# Altium PCB nucleo_breakout.PcbDoc
Units mil, origin at the board's own origin, x right, y up, seen from the top; angles counter-clockwise.
Board outline 5250 x 4000 mil, 2 copper layers (Top Layer, Bottom Layer); 8 components, 17 nets, 132 pads, 5 vias.
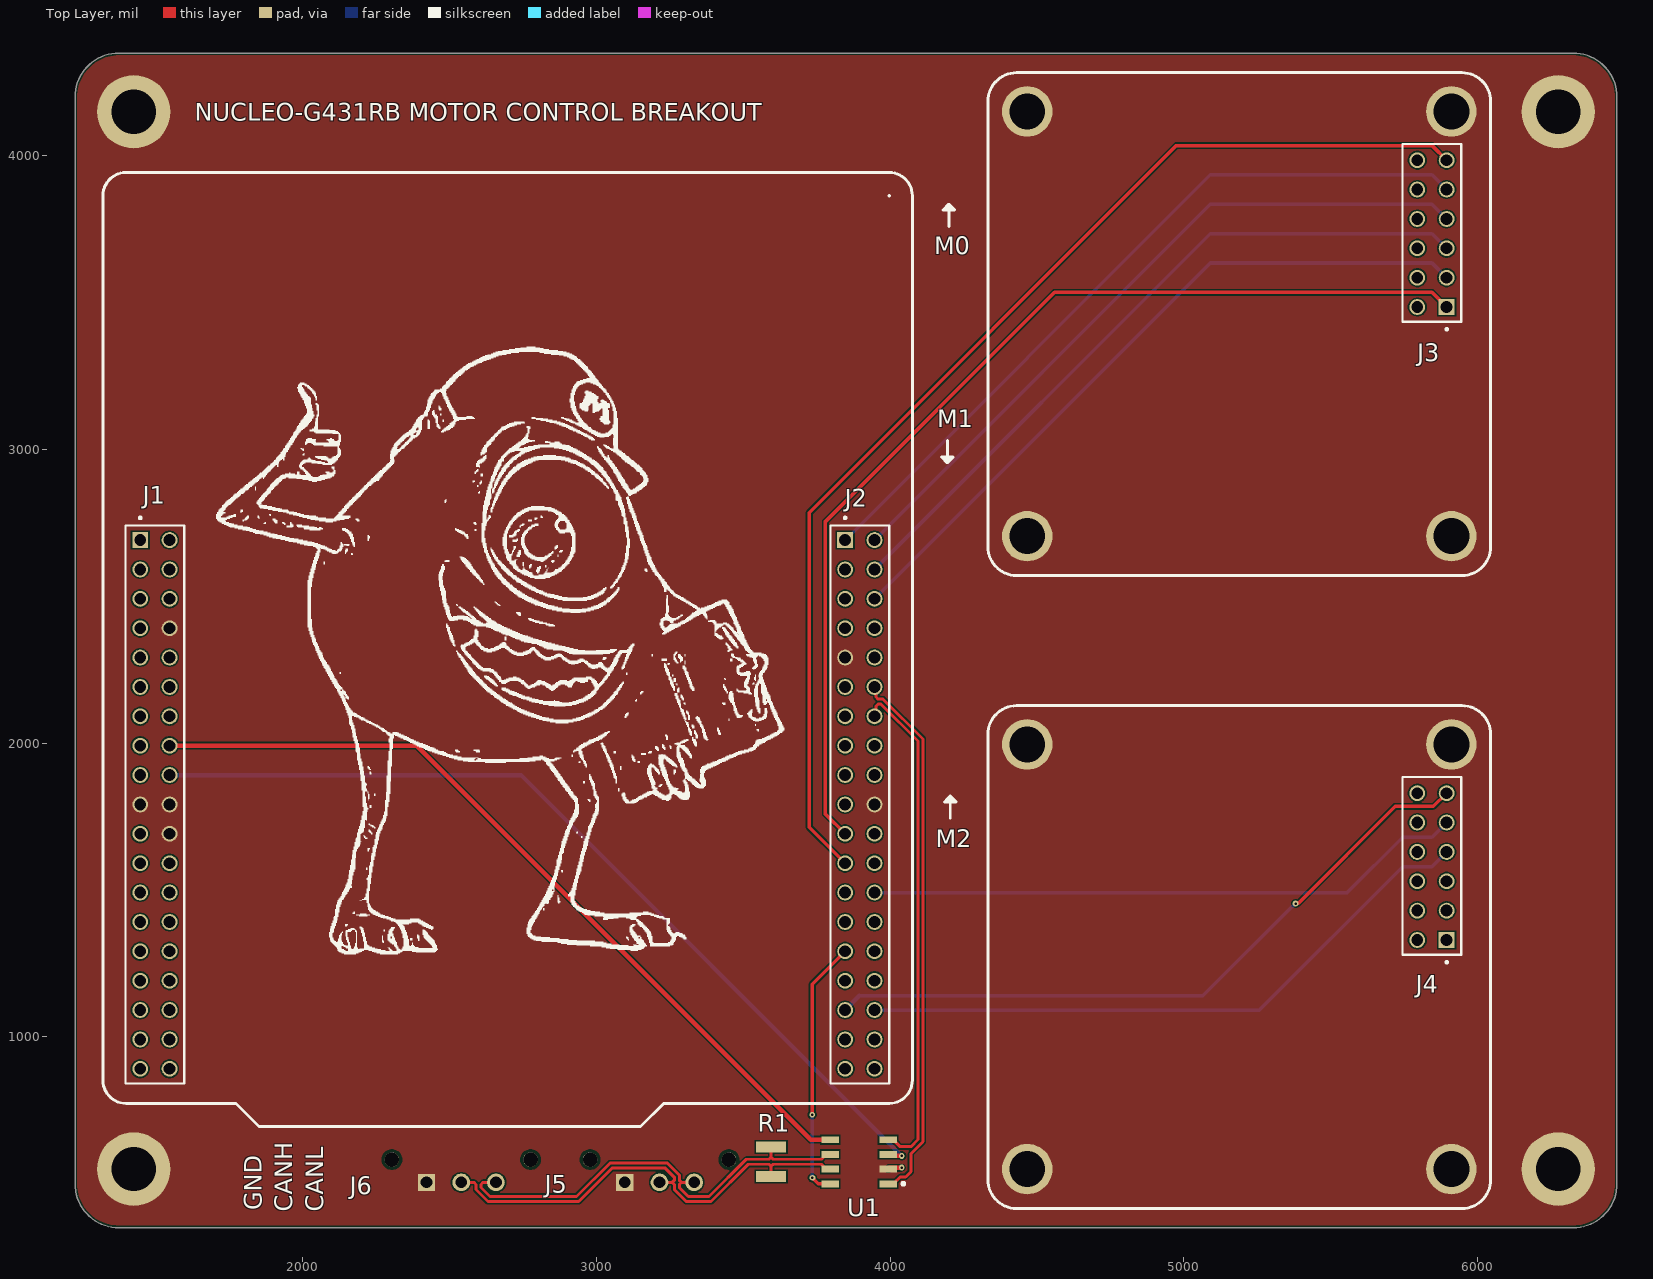
[diagram p0: Top Layer view]
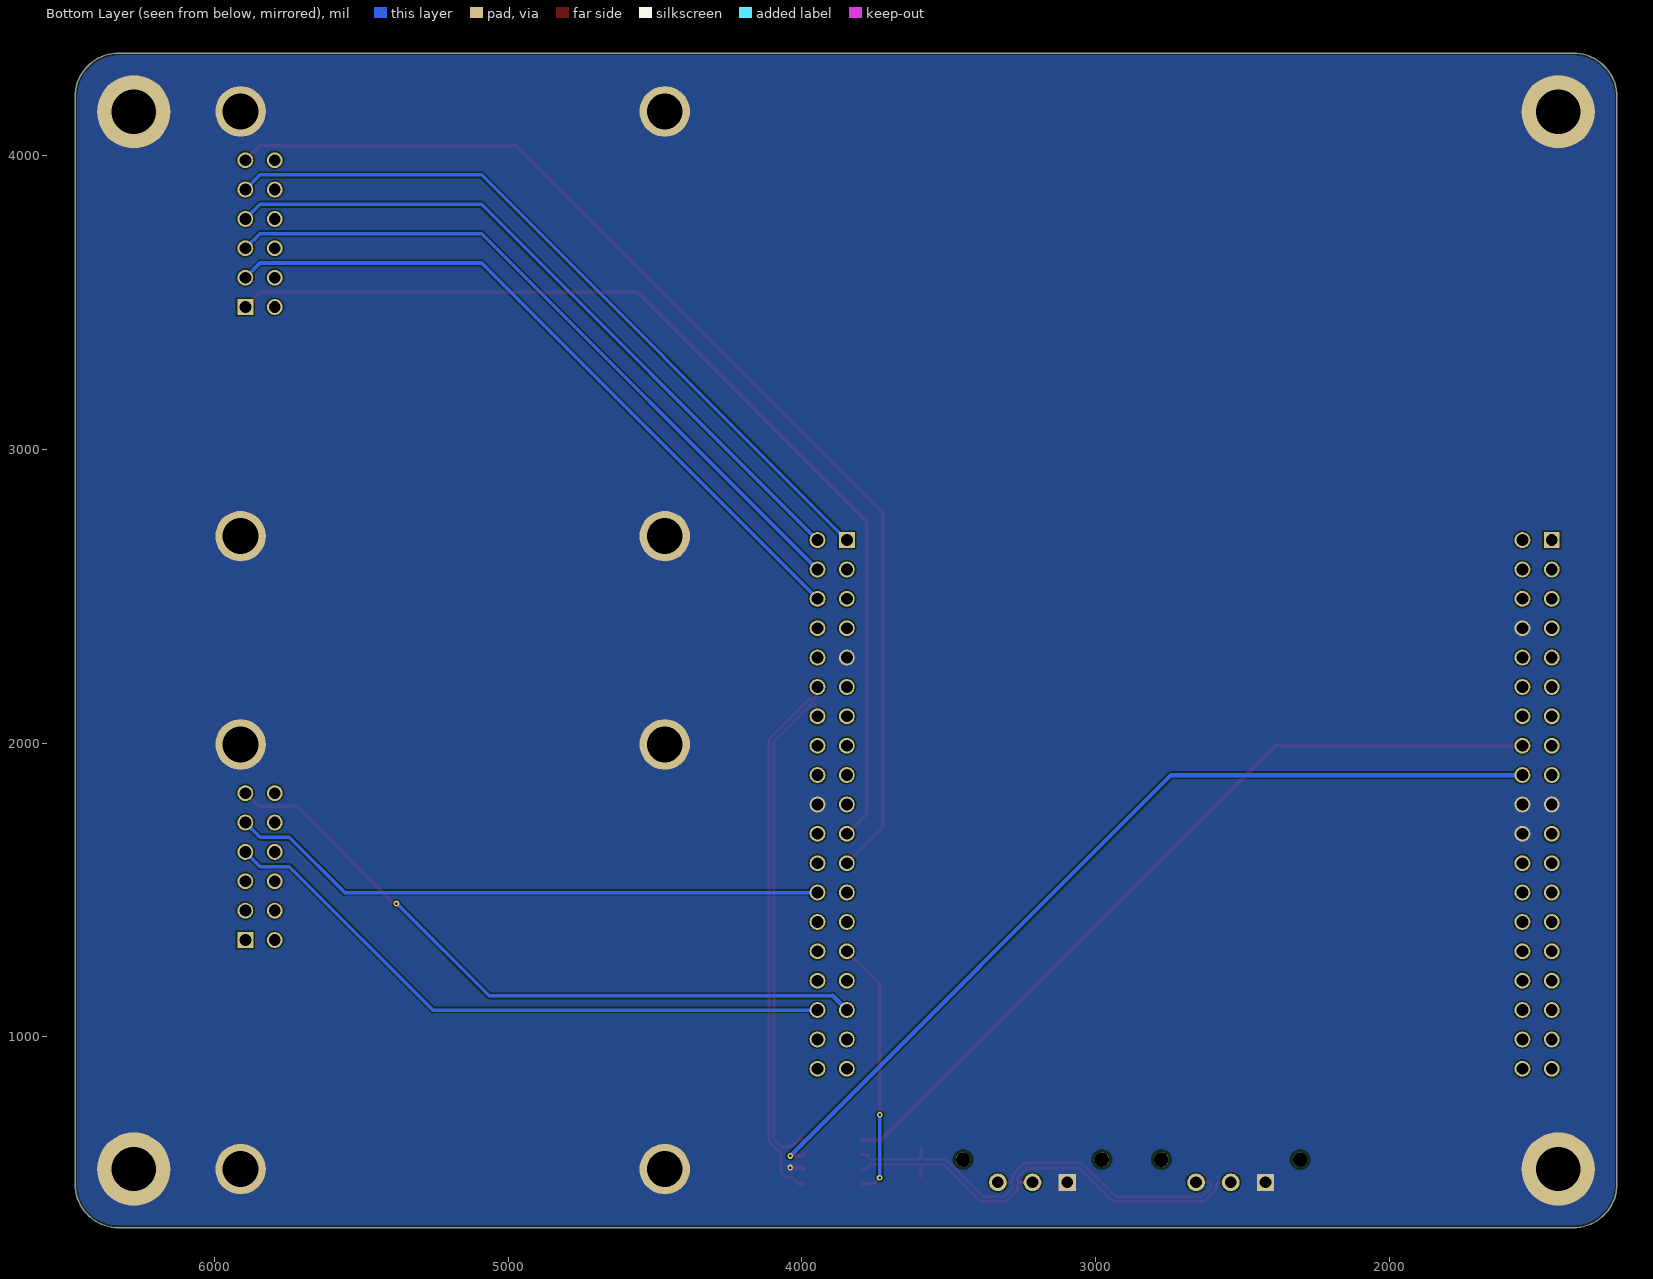
[diagram p1: Bottom Layer view, seen from below]
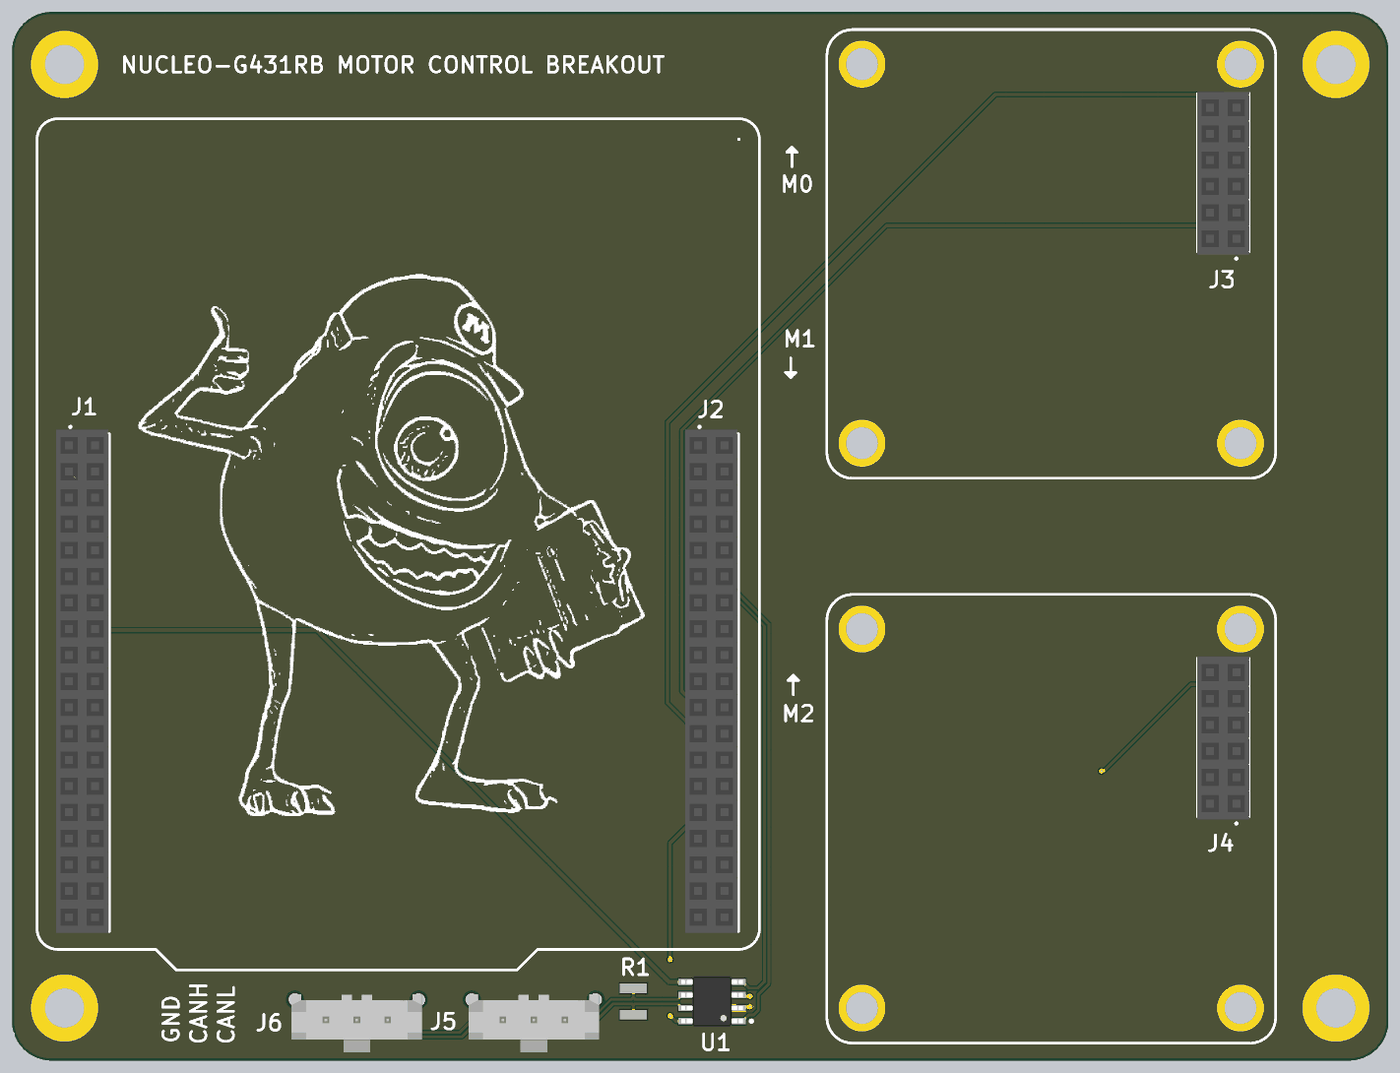
[diagram p2: 3D render of the assembled board from above, using the file's embedded part models]

## Layer stack, top to bottom
Top Solder: solder mask 0.4, Solder Resist, Dk 3.5
Top Layer: signal copper 1.4
Dielectric 1: dielectric 12.6, FR-4, Dk 4.8
Bottom Layer: signal copper 1.4
Bottom Solder: solder mask 0.4, Solder Resist, Dk 3.5

## Board outline
1225,500 ccw(c1375,500) 1375,350 6325,350 ccw(c6325,500) 6475,500 6475,4200 ccw(c6325,4200) 6325,4350 1375,4350 ccw(c1375,4200) 1225,4200

## Design rules (kind name [scope] priority, off if disabled: settings)
BoardOutlineClearance [All] p1: gap=7.87 ignorepadtopadclearanceinfootprint=FALSE
Clearance [All] p1: gap=5 ignorepadtopadclearanceinfootprint=FALSE except(9.84: Arc-Hole Track-Hole SMDPad-Hole THPad-Hole Via-Hole Fill-Hole Poly-Hole Region-Hole Text-Hole)
ComponentClearance [All] p1: gap=5 collisioncheckmode=3 verticalgap=5 showdistances=TRUE
DiffPairsRouting [All] p1: maxlimit=10 minlimit=5 mostfreqgap=5 toplayer_minwidth=5 toplayer_maxwidth=1000 toplayer_prefwidth=5 bottomlayer_minwidth=5 bottomlayer_maxwidth=1000 bottomlayer_prefwidth=5 maxuncoupledlength=500
Height [All] p1: minheight=0 maxheight=71497.94 prefheight=500
HoleSize [All] p1: absolutevalues=TRUE maxlimit=248.03 minlimit=11.81 maxpercent=80.000 minpercent=20.000
HoleToHoleClearance [All] p1: gap=9.84 allowstackedmicrovias=FALSE
MinimumAnnularRing [All] p1: minimumring=3
MinimumSolderMaskSliver [All] p1: minsoldermaskwidth=0
PlaneClearance [All] p1: clearance=5
PlaneConnect PlaneConnectPowerPads [InPadClass('PowerPads')] p1: planeconnectstyle=Direct reliefexpansion=20 reliefentries=4 reliefconductorwidth=10 reliefairgap=10
PlaneConnect [All] p2: pad.planeconnectstyle=Relief pad.reliefexpansion=11.81 pad.reliefentries=4 pad.reliefconductorwidth=5 pad.reliefairgap=5 via.planeconnectstyle=Direct via.reliefexpansion=11.81 via.reliefentries=4 via.reliefconductorwidth=5 via.reliefairgap=5
PolygonConnect PolygonConnectPowerPads [All vs (InPadClass('PowerPads'))] p1: connectstyle=Direct reliefconductorwidth=10 reliefentries=4 polygonreliefangle="90 Angle" airgapwidth=10
PolygonConnect [All] p2: connectstyle=Direct reliefconductorwidth=5 reliefentries=4 polygonreliefangle="90 Angle" airgapwidth=5
RoutingVias [All] p1: holewidth=11.81 width=23.62 viastyle="Through Hole" minholewidth=11.81 minwidth=23.62 maxholewidth=23.62 maxwidth=259.84
SilkToSilkClearance [All] p1: silktosilkclearance=0
SilkToSolderMaskClearance [IsPad] p1: minsilkscreentomaskgap=5 clearancetoexposedcopper=TRUE
SolderMaskExpansion [All] p1: expansion=2.95 istentingtop=FALSE
Width [All] p1: maxlimit=1000 minlimit=5 preferedwidth=5 minimp=50.000000 maximp=50.000000 favimp=50.000000
20 further rules are at their usual default settings.

## Components (designator, comment, footprint, x,y, rotation, side; value= is the part's Value field where it differs from the comment)
J1 "PPPC192LFBN-RC" CONN-38POS_01 1447.05,2691.57 r270 top
J2 "PPPC192LFBN-RC" CONN-38POS_01 3847.05,2691.57 r270 top
J3 "PPTC062LFBN-RC" CONN-6POS_01 5895,3485 r90 top
J4 "PPTC062LFBN-RC" CONN-6POS_01 5895,1330 r90 top
J5 "Molex 43650-0315" 43650-0315 3215,505 r180 top
J6 "Molex 43650-0315" 43650-0315 2540,505 r180 top
R1 "RC1210FR-07120RL" RES-1210 3595,575 r90 top
U1 "TCAN1044VDRQ1" IC-8SOIC 3895,575 r90 top

## Footprints (in the part's own frame and the unit in brackets; to place one, negate y for a bottom-side part, rotate by r counter-clockwise, add the part's x,y. Pads: shape width x height; smd on the part's side, far side on the other; paste and mask are expansions set on the pad)
43650-0315 [mm]
  round 1.27 hole 1.27 unplated: 1(-6,-1.96) 1(6,-1.96)
  rect 1.482x1.482 / inner rect 1.524x1.524 / far side rect 1.482x1.482 hole 1.02: P$1(3,0)
  round 1.53 / inner round 1.524 / far side round 1.53 hole 1.02: P$2(0,0) P$3(-3,0)
  body extent -6.32,-2.47 6.33,3.14, height 10.03
CONN-6POS_01 [mm]
  rect 1.37x1.37 hole 1.02: 1(0,0)
  round 1.37 hole 1.02: 2(0,2.54) 3(2.54,0) 4(2.54,2.54) 5(5.08,0) 6(5.08,2.54) 7(7.62,0) 8(7.62,2.54) 9(10.16,0) 10(10.16,2.54) 11(12.7,0) 12(12.7,2.54)
  silkscreen extent -2.02,-1.27 14.1,3.81, body extent -1.52,-1.27 14.22,3.81, height 8.51
CONN-38POS_01 [mm]
  rect 1.37x1.37 hole 1.02: 1(0,0)
  round 1.37 hole 1.02: 2(0,2.54) 3(2.54,0) 4(2.54,2.54) 5(5.08,0) 6(5.08,2.54) 7(7.62,0) 8(7.62,2.54) 9(10.16,0) 10(10.16,2.54) 11(12.7,0) 12(12.7,2.54) 13(15.24,0) 14(15.24,2.54) 15(17.78,0) 16(17.78,2.54) 17(20.32,0) 18(20.32,2.54) 19(22.86,0) 20(22.86,2.54) 21(25.4,0) 22(25.4,2.54) 23(27.94,0) 24(27.94,2.54) 25(30.48,0) 26(30.48,2.54) 27(33.02,0) 28(33.02,2.54) 29(35.56,0) 30(35.56,2.54) 31(38.1,0) 32(38.1,2.54) 33(40.64,0) 34(40.64,2.54) 35(43.18,0) 36(43.18,2.54) 37(45.72,0) 38(45.72,2.54)
  silkscreen extent -2.02,-1.27 46.99,3.81, body extent -1.65,-1.4 47.12,3.68, height 8.51
IC-8SOIC [mm]
  rect 0.6x1.5 smd: 1(-1.905,-2.5) 2(-0.635,-2.5) 3(0.635,-2.5) 4(1.905,-2.5) 5(1.905,2.5) 6(0.635,2.5) 7(-0.635,2.5) 8(-1.905,2.5)
  silkscreen extent -2.03,-3.94 -1.78,-3.69, body extent -2.45,-3 2.45,3, height 1.75
RES-1210 [mm] "Chip Resistor, 2-Leads, Body 3.10x2.60mm, IPC High Density"
  rect 0.95x2.6 smd: 1(-1.275,0) 2(1.275,0)
  body extent -1.6,-1.35 1.6,1.35, height 0.6

## Part data
J1 J2: library part CONN-38POS-01
J3 J4: library part CONN-12POS-01, "12 Position Header Connector 0.100\" (2.54mm) Through Hole Tin"
J5 J6: library part "Micro-Fit Molex 3 Pin Vertical", Package=43650-0315, DeviceName=43650-0315, DeviceSetName=HEADER_POS3_?, GateName_1=G$1, LibraryName=con-molex-micro-fit-3_0_2, SymbolName_1=HEADER_POS3
R1: library part RES-120-0001, "RES 120 OHM 1% 1/2W 1210", Power=1/2W, Resistance=120R, Tolerance=1%, ComponentLink1Description=Datasheet, ComponentLink1URL=https://www.yageo.com/upload/media/product/products/datasheet/rchip/PYu-RC_Group_51_RoHS_L_12.pdf, Size=1210
U1: library part IC-CAN-0001, "IC TRANSCEIVER 1/1 8SOIC", ComponentLink1Description=Datasheet, ComponentLink1URL=https://www.ti.com/lit/ds/symlink/tcan1044-q1.pdf?HQS=dis-dk-null-digikeymode-dsf-pf-null-wwe&ts=1728758303289&ref_url=https%253A%252F%252Fwww.ti.com%252Fgeneral%252Fdocs%252Fsuppproductinfo.tsp%253FdistId%253D10%2526gotoUrl%253Dhttps%253A%252F%252Fwww.ti.com%252Flit%252Fgpn%252Ftcan1044-q1

## Free pads (board coordinates)
  round 250 hole 150: ""(1425,550) ""(1425,4150) ""(6275,550) ""(6275,4150)
  round 172 hole 122: ""(4467,550) ""(4467,1996) ""(4467,2705) ""(4467,4151) ""(5911,550) ""(5911,1996) ""(5911,2705) ""(5911,4151)

## Via types
v1: diameter 20, hole 8, Top Layer to Bottom Layer, 5 vias

## Nets (pads, with @x,y where several pads share a name; then routed paths per layer and width w, separated by ;. In a path a pad name is that pad's centre, name@x,y a point inside that pad or via, vN(x,y) a via of type N, cw(c..) or ccw(c..) an arc to the next point about the centre after c; other vN are vias at no path point)
3V3: J1.16 U1.5 | length 2805.2
  Top Layer w15: J1.16 2388.43,1991.57 3730,650 U1.5
5V: J1.18 U1.3 | length 3078.7
  Top Layer w15: U1.3 3997.47,595.96 4039.04,595.96 v1(4040,595)
  Bottom Layer w15: J1.18 2743.43,1891.57 v1(4040,595)
CAN_N: J5.P$3 J6.P$3 R1.2 U1.6 | length 1535.3
  Top Layer w10: J6.P$3 2614.58,505 2607.55,497.97 2607.55,487.5 2638.18,456.88 2932.84,456.88 3046.08,570.12 3241.97,570.12 3282.55,529.54 3282.55,512.03 3289.58,505 ; J5.P$3 3289.58,505 ; R1.2 3595,590.53 ; U1.6 3778.86,600 3773.05,594.19 3773.05,590.53 3766.02,583.5 3704.29,583.5 3602.03,583.5 3595,590.53 ; 3289.58,505 3282.55,497.97 3282.55,487.5 3313.18,456.88 3383.69,456.88 3510.31,583.5 3587.97,583.5 3595,590.53
CAN_P: J5.P$2 J6.P$2 R1.1 U1.7 | length 1563.5
  Top Layer w10: J6.P$2 2583.53,505 2590.55,497.97 2590.55,480.46 2631.14,439.88 2939.88,439.88 3053.12,553.12 3234.93,553.12 3265.55,522.5 3265.55,512.03 3258.53,505 ; J5.P$2 3258.53,505 ; R1.1 3595,559.47 ; U1.7 3778.86,550 3773.05,555.81 3773.05,559.47 3766.02,566.5 3697.25,566.5 3602.03,566.5 3595,559.47 ; 3258.53,505 3265.55,497.97 3265.55,480.46 3306.14,439.88 3390.73,439.88 3517.35,566.5 3587.97,566.5 3595,559.47
CAN_STB: J2.29 U1.8 | length 887.3
  Top Layer w12: v1(3735,735) 3735,1179.53 J2.29 ; v1(3735.48,520.48) 3755.96,500 U1.8
  Bottom Layer w12: v1(3735,735) 3735.24,734.76 3735.24,520.72 v1(3735.48,520.48)
DIR_0: J2.1 J3.9 | length 2583.7
  Bottom Layer w12: J2.1 5090.47,3935 5845,3935 J3.9
DIR_1: J2.2 J3.7 | length 2442.3
  Bottom Layer w12: J2.2 5090.47,3835 5845,3835 J3.7
DIR_2: J2.4 J3.5 | length 2442.3
  Bottom Layer w12: J2.4 5090.47,3735 5845,3735 J3.5
DIR_3: J2.6 J3.3 | length 2442.3
  Bottom Layer w12: J2.6 5090.47,3635 5845,3635 J3.3
DIR_4: J2.26 J4.9 | length 2046.7
  Bottom Layer w12: J2.26 5556.57,1491.58 5745,1680 5845,1680 J4.9
DIR_5: J2.34 J4.7 | length 2171
  Bottom Layer w12: J2.34 5256.57,1091.58 5745,1580 5845,1580 J4.7
FDCAN_RX: J2.14 U1.4 | length 1712.5
  Top Layer w10: J2.14 3952.17,2096.7 3952.17,2126.05 3959.2,2133.07 3969.14,2133.07 4095,2007.22 4095,650.46 4070.99,626.44 4034.7,626.44 4011.14,650 U1.4
FDCAN_TX: J2.12 U1.1 | length 1846.3
  Top Layer w10: J2.12 3952.17,2186.45 3952.17,2157.1 3959.2,2150.07 3976.18,2150.07 4112,2014.26 4112,643.41 4071,602.41 4071,576.07 4071,541.3 4053.25,523.56 4034.7,523.56 4011.14,500 U1.1 U1.1@3997.74,504.31
GND: J1.8 J1.19 J1.20 J1.22 J2.9 J2.20 J5.P$1 J6.P$1 pad. U1.2 | length 48.6
  Top Layer w15: U1.2 3997.47,554.04 4039.04,554.04 v1(4040,555)
PWM_0: J2.23 J3.11 | length 3952.5
  Top Layer w12: J2.23 3725,1713.62 3725,2785 4975,4035 5845,4035 J3.11
PWM_1: J2.21 J3.1 | length 3550
  Top Layer w12: J2.21 3780,1758.62 3780,2755 4560,3535 5845,3535 J3.1
PWM_2: J2.33 J4.11 | length 2353.7
  Top Layer w12: v1(5380.96,1454.04) 5382.49,1455.57 5390.57,1455.57 5720,1785 5850,1785 J4.11
  Bottom Layer w12: 3895.47,1140 5065,1140 v1@5380.34,1455.34
  Bottom Layer w15: J2.33 3895.47,1140
pads on no net: J1.1 J1.2 J1.3 J1.4 J1.5 J1.6 J1.7 J1.9 J1.10 J1.11 J1.12 J1.13 J1.14 J1.15 J1.17 J1.21 J1.23 J1.24 J1.25 J1.26 J1.27 J1.28 J1.29 J1.30 J1.31 J1.32 J1.33 J1.34 J1.35 J1.36 J1.37 J1.38 J2.3 J2.5 J2.7 J2.8 J2.10 J2.11 J2.13 J2.15 J2.16 J2.17 J2.18 J2.19 J2.22 J2.24 J2.25 J2.27 J2.28 J2.30 J2.31 J2.32 J2.35 J2.36 J2.37 J2.38 J3.2 J3.4 J3.6 J3.8 J3.10 J3.12 J4.1 J4.2 J4.3 J4.4 J4.5 J4.6 J4.8 J4.10 J4.12 J5.1 J6.1

## Polygon pours and split planes (outlines as drawn)
GND on Top Layer "GND_L01_P000" (solid, pour order 0): 1225,500 ccw(c1375,500) 1375,350 6325,350 ccw(c6325,500) 6475,500 6475,4200 ccw(c6325,4200) 6325,4350 1375,4350 ccw(c1375,4200) 1225,4200
GND on Bottom Layer "GND_L02_P001" (solid, pour order 1): 1225,500 ccw(c1375,500) 1375,350 6325,350 ccw(c6325,500) 6475,500 6475,4200 ccw(c6325,4200) 6325,4350 1375,4350 ccw(c1375,4200) 1225,4200

## Silkscreen, mask and mechanical layers (free items; w line width, h text height)
Top Overlay:
  drawing of 221 lines, arcs and shapes, not listed
  text "NUCLEO-G431RB MOTOR CONTROL BREAKOUT" at 1633.3,4120.01 h60
  text "M0" at 4150,3665 h60
  text "M1" at 4160,3075 h60
  text "M2" at 4155,1645 h60
  text "GND" at 1860,410 h60 r90
  text "CANH" at 1965,405 h60 r90
  text "CANL" at 2070,405 h60 r90
Mechanical 1:
  the board outline again, w10